# Altium PCB main.PcbDoc
Units mm, origin at the board's own origin, x right, y up, seen from the top; angles counter-clockwise.
Board outline 161.93 x 70.61 mm, 2 copper layers (Top Layer, Bottom Layer); 28 components, 53 nets, 163 pads, 28 vias.
Unrouted connection lines stored in the file: 2.
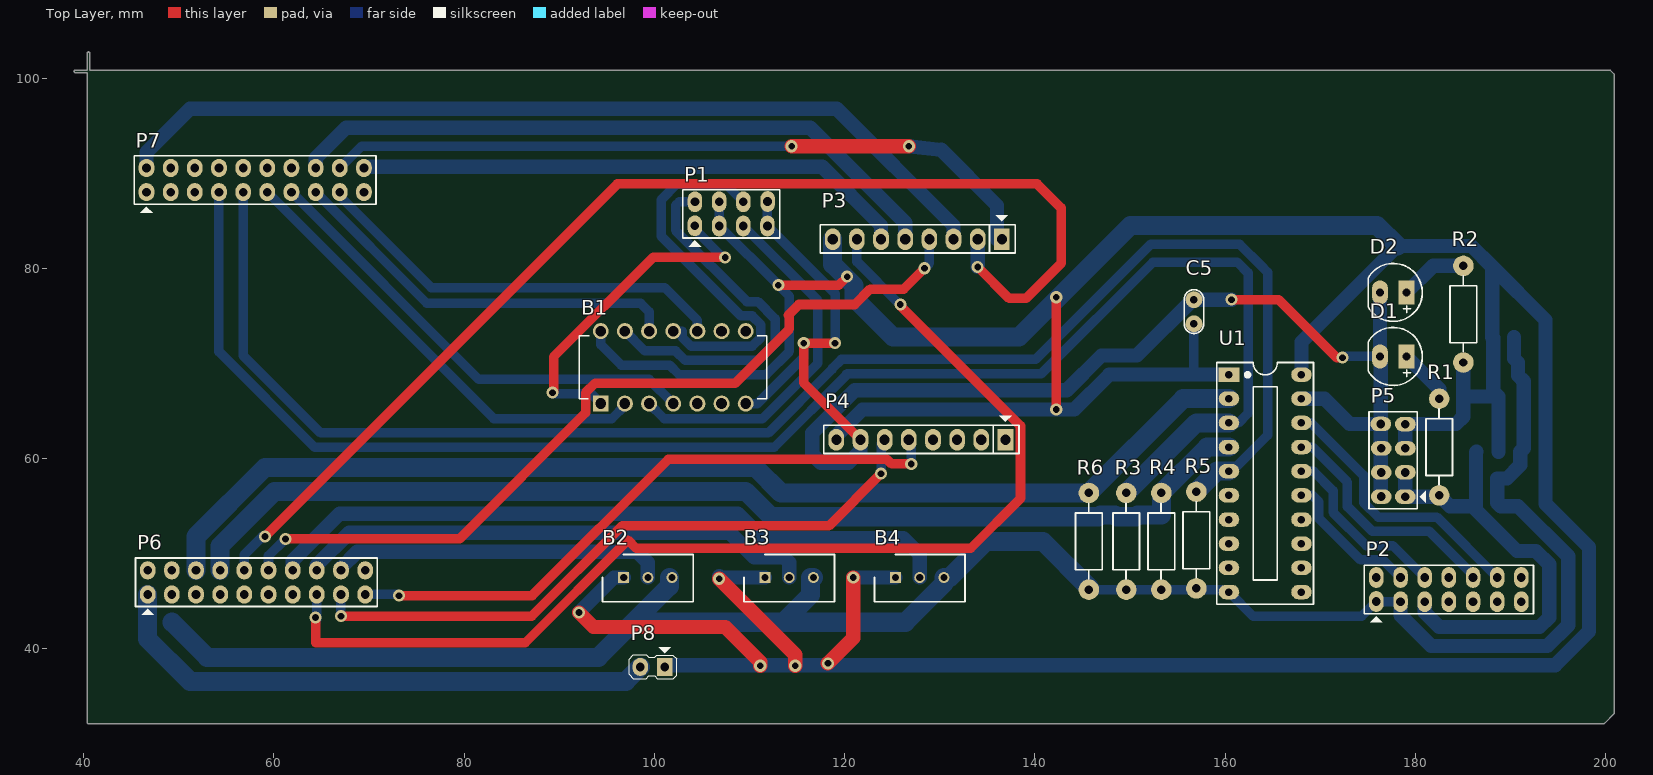
[diagram p0: Top Layer view]
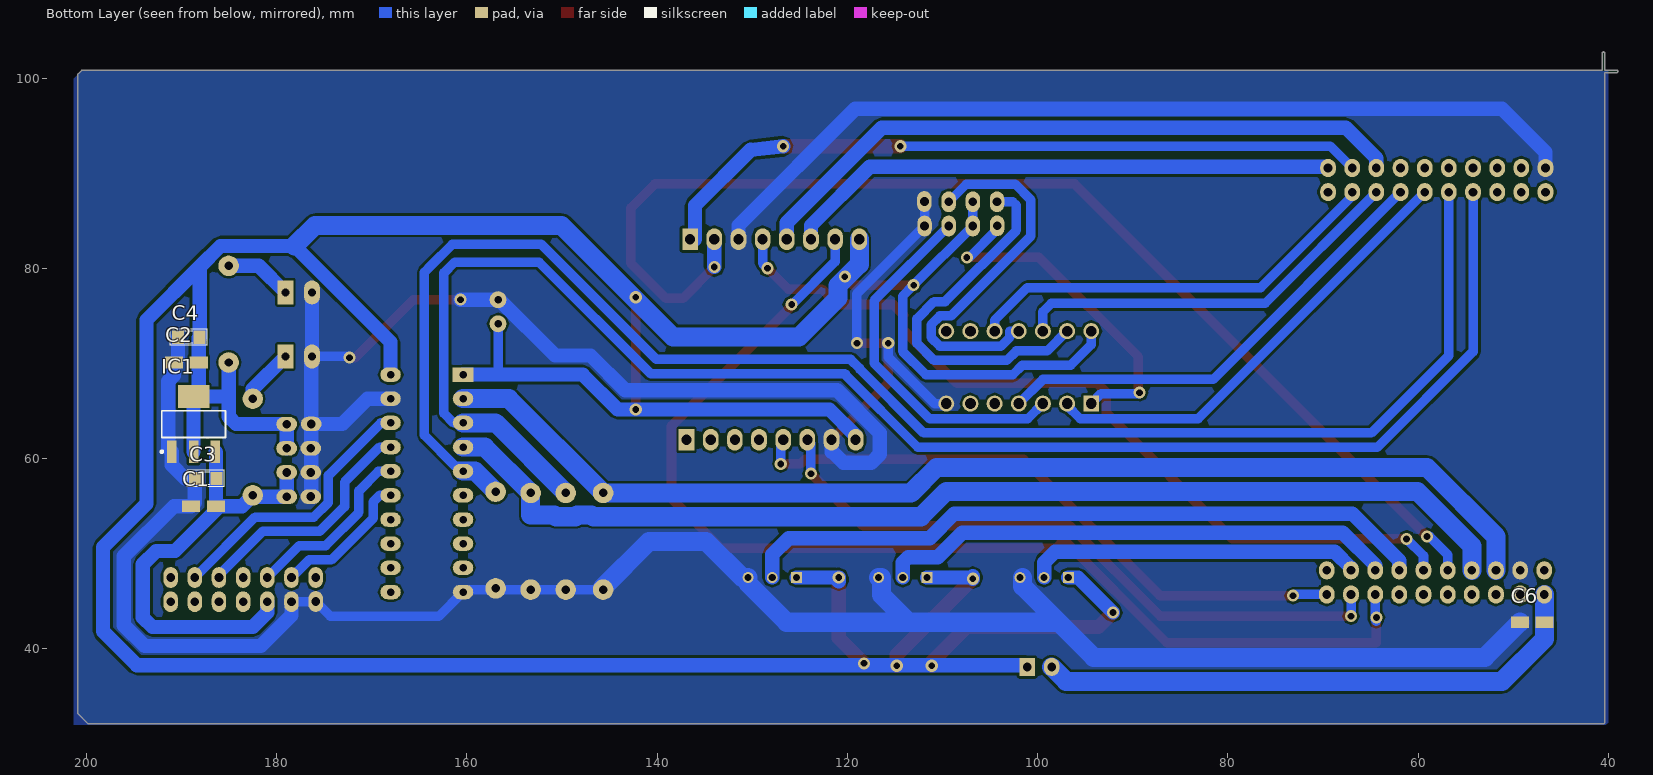
[diagram p1: Bottom Layer view, seen from below]
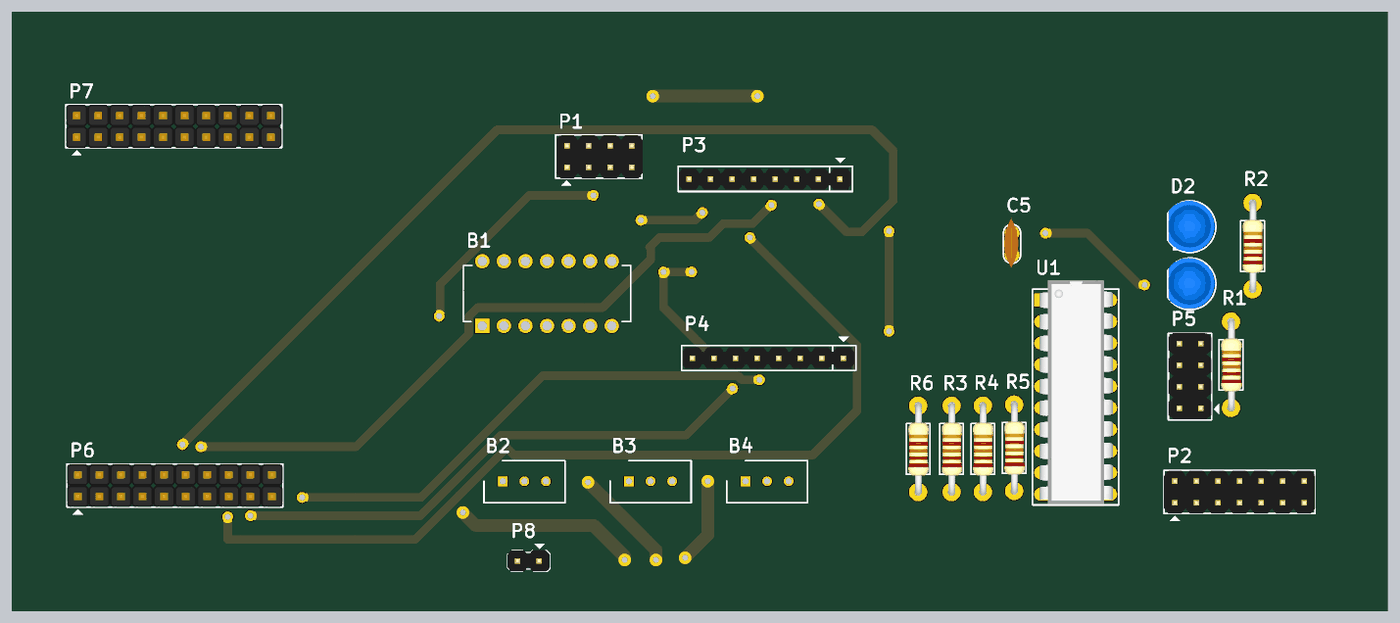
[diagram p2: 3D render of the assembled board from above, using the file's embedded part models]
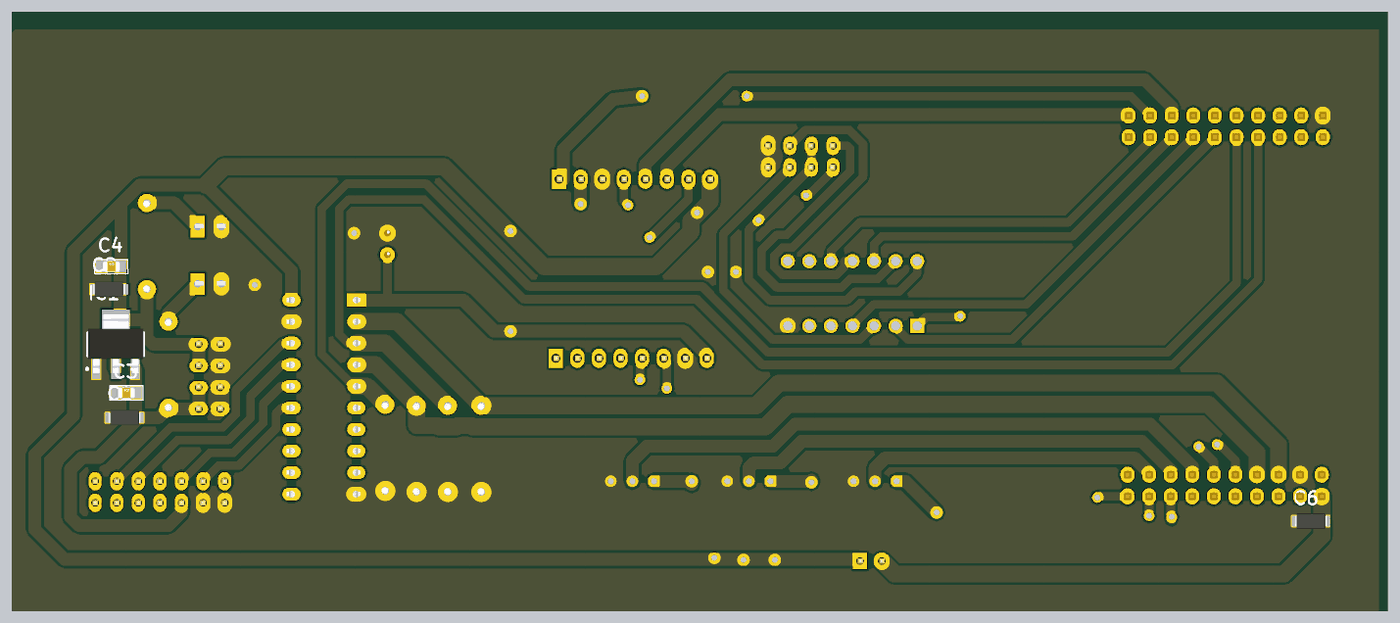
[diagram p3: 3D render of the assembled board from below, using the file's embedded part models]

## Layer stack, top to bottom
Top Solder: solder mask 0.0102, Solder Resist, Dk 3.5
Top Layer: signal copper 0.0356
Dielectric 1: dielectric 0.32, FR-4, Dk 4.8
Bottom Layer: signal copper 0.0356
Bottom Solder: solder mask 0.0102, Solder Resist, Dk 3.5

## Board outline
39.116,100.584 40.386,100.584 40.386,32.258 ccw(c40.513,32.258) 40.513,32.131 199.771,32.131 ccw(c199.771,32.258) 199.862,32.168 199.861,32.168 200.877,33.184 200.877,33.183 ccw(c200.787,33.274) 200.914,33.274 200.914,100.33 ccw(c200.787,100.33) 200.877,100.421 200.877,100.42 200.496,100.801 200.497,100.801 ccw(c200.406,100.711) 200.406,100.838 40.64,100.838 40.64,102.616 ccw(c40.513,102.616) 40.386,102.616 40.386,100.838 39.116,100.838 ccw(c39.116,100.711)

## Design rules (kind name [scope] priority, off if disabled: settings)
Clearance [All] p1: gap=0.254 ignorepadtopadclearanceinfootprint=FALSE except(0: Arc-Hole Track-Hole SMDPad-Hole THPad-Hole Via-Hole Fill-Hole Poly-Hole Region-Hole Text-Hole; 0.5: Arc-Arc Arc-Track Track-Track)
PlaneConnect [All] p1: planeconnectstyle=Direct reliefexpansion=0.508 reliefentries=4 reliefconductorwidth=0.254 reliefairgap=0.254
PolygonConnect [All] p1: connectstyle=Direct reliefconductorwidth=0.254 reliefentries=4 polygonreliefangle="90 Angle" airgapwidth=0.254
RoutingVias [All] p1: holewidth=0.711 width=1.27 viastyle="Through Hole" minholewidth=0.711 minwidth=1.27 maxholewidth=0.711 maxwidth=1.27
SolderMaskExpansion [All] p1: expansion=0.102
Width [All] p1: maxlimit=2 minlimit=1 preferedwidth=1.5
29 further rules are at their usual default settings.

## Components (designator, comment, footprint, x,y, rotation, side; value= is the part's Value field where it differs from the comment)
B1 "SN74HC14N" DIP254P762X508-14 109.601,73.406 r90 top
B2 "3296W-1-103LF" SHDR3W54P0X254_1X3_953X483X1155P 96.774,47.498 r180 top
B3 "3296W-1-103LF" SHDR3W54P0X254_1X3_953X483X1155P 111.633,47.498 r180 top
B4 "3296W-1-103LF" SHDR3W54P0X254_1X3_953X483X1155P 125.349,47.498 r180 top
C1 "Capacitors" "CAP TANTALUM SMD-1206" 187.676,54.991 r0 bottom
C2 "Capacitors" "CAP TANTALUM SMD-1206" 189.484,70.104 r0 bottom
C3 "Cap Non-Pol SMD" CAP-SM-0805 188.595,57.912 r180 bottom value=100nF
C4 "Cap Non-Pol SMD" CAP-SM-0805 190.373,72.771 r180 bottom value=100nF
C5 "Cap Non-Pol" CN1 156.718,74.168 r90 top value=100nF
C6 "Capacitors" "CAP TANTALUM SMD-1206" 48.006,42.799 r0 bottom
D1 "LED" LED-5mm 177.673,70.739 r180 top
D2 "LED" LED-5mm 177.673,77.47 r180 top
IC1 "LM1117" SOT223-4N 188.722,63.627 r90 bottom value=LM317
P1 "Header 4X2" JP4x2 104.267,84.455 r0 top
P2 "Header 7X2" JP7X2 175.895,44.958 r0 top
P3 "CC2500" JP8 136.525,83.058 r180 top
P4 "MPU6050" JP8 136.906,61.976 r180 top
P5 "Header 4X2" JP4x2 178.943,56.007 r90 top
P6 "Header 10X2" JP10X2 46.736,45.72 r0 top
P7 "Header 10X2" JP10X2 46.609,88.011 r0 top
P8 "Header 2" JP2 101.092,38.1 r180 top
R1 "Resistor 1/4W" "RES 1/2W" 182.499,66.294 r270 top value=2K2
R2 "Resistor 1/4W" "RES 1/2W" 185.039,80.264 r270 top value=330
R3 "Resistor 1/4W" "RES 1/2W" 149.606,56.388 r270 top
R4 "Resistor 1/4W" "RES 1/2W" 153.289,56.388 r270 top
R5 "Resistor 1/4W" "RES 1/2W" 156.972,56.515 r270 top
R6 "Resistor 1/4W" "RES 1/2W" 145.669,56.388 r270 top value=10K
U1 "74HC245" DIP20/W0.3 160.401,68.834 r270 top

## Footprints (in the part's own frame and the unit in brackets; to place one, negate y for a bottom-side part, rotate by r counter-clockwise, add the part's x,y. Pads: shape width x height; smd on the part's side, far side on the other; paste and mask are expansions set on the pad)
"CAP TANTALUM SMD-1206" [mm] "Molded Capacitor, 2-Leads, Body 3.30x1.70mm, IPC Medium Density"
  rect 1.9x1.25 smd: 1(-1.3,0) 2(1.3,0)
  body extent -1.92,-0.9 1.92,0.9, height 1.6
CAP-SM-0805 [mil]
  rect 50x55 smd: 1(0,0) 2(90,0)
  silkscreen extent -32,-34 121,33, body extent 6,-25 84,25, height 31
CN1 [mil]
  round 70 hole 31: 1(0,0) 2(100,0)
  silkscreen extent -40,-40 141,40, body extent -60,-30 170,37, height 265
DIP20/W0.3 [mil] "DIP 20, 20 PIN, W 300mil, Pin to pin 100mil"
  rect 60x85 hole 31: 1(0,0)
  oval 60x85 hole 31: 2(100,0) 3(200,0) 4(300,0) 5(400,0) 6(500,0) 7(600,0) 8(700,0) 9(800,0) 10(900,0) 11(900,300) 12(800,300) 13(700,300) 14(600,300) 15(500,300) 16(400,300) 17(300,300) 18(200,300) 19(100,300) 20(0,300)
  silkscreen extent -50,-50 950,350, body extent -91,-18 945,322, height 155
DIP254P762X508-14 [mil]
  rect 66x66 / inner round 66 / far side rect 66x66 hole 44: 1(-300,600)
  round 66 hole 44: 2(-300,500) 3(-300,400) 4(-300,300) 5(-300,200) 6(-300,100) 7(-300,0) 8(0,0) 9(0,100) 10(0,200) 11(0,300) 12(0,400) 13(0,500) 14(0,600)
  silkscreen extent -280,-88 -20,688
JP2 [mil]
  rect 65x75 hole 36: 1(0,0)
  oval 65x75 hole 36: 2(101,0)
  silkscreen extent -49,-81 148,48, body extent -48,-50 148,48, height 323
JP4x2 [mil] "Connector 4x2"
  oval 60x86 hole 36: 1(-0.5,0.5) 2(0,100) 3(100,0) 4(100,100) 5(200,0) 6(200,100) 7(300,0) 8(300.5,101.5)
  silkscreen extent -50,-85 350,150, body extent -47,-50 353,150, height 335
JP7X2 [mil]
  oval 60x86 hole 36: 1(-0.5,0.5) 2(0,100) 3(100,0) 4(100,100) 5(200,0) 6(200,100) 7(300,0) 8(300,100) 9(400,0) 10(400,100) 11(500,0) 12(500,100) 13(600,0) 14(600,100)
  silkscreen extent -50,-85 650,150, body extent -50,-50 650,150, height 335
JP8 [mil] "JP8"
  rect 65x90 hole 42: 1(0,0)
  oval 65x90 hole 42: 2(100,0) 3(200,0) 4(300,0) 5(400,0) 6(500,0) 7(600,0) 8(700,0)
  silkscreen extent -56,-100 752,57, body extent -48,-50 748,48, height 323
JP10X2 [mil]
  oval 65x75 hole 36: 1(0,0) 2(0,100) 3(100,0) 4(100,100) 5(200,0) 6(200,100) 7(300,0) 8(300,100) 9(400,0) 10(400,100) 11(500,0) 12(500,100) 13(600,0) 14(600,100) 15(700,0) 16(700,100) 17(800,0) 18(800,100) 19(900,0) 20(900,100)
  silkscreen extent -50,-85 950,150, body extent -50,-50 950,150, height 314
LED-5mm [mil] "LED 2 PIN, 5 ly , Only colour, pin to pin 110mil"
  rect 65x100 hole 32: 1(-55,0)
  oval 65x100 hole 32: 2(55,0)
  silkscreen extent -120,-120 104,120, body extent -113,-120 100,117, height 339
"RES 1/2W" [mil] "R 1/2W, 2 pin, 300mil"
  round 85 hole 35: 1(0,0) 2(400,0)
  silkscreen extent 42,-55 356,55, body extent -12,-45 414,49, height 91
SHDR3W54P0X254_1X3_953X483X1155P [mm]
  rect 1.15x1.15 / inner round 1.15 / far side rect 1.15x1.15 hole 0.75: 1(0,0)
  round 1.15 hole 0.75: 2(-2.54,0) 3(-5.08,0)
  silkscreen extent -7.31,-2.41 2.22,2.55
SOT223-4N [mm] "SOT223, 4-Leads, Body 6.5x3.5mm, Pitch 2.3mm, Lead Span 7mm, IPC Medium Density"
  rect 2.4x1 smd: 1(-2.9,2.3) 2(-2.9,0) 3(-2.9,-2.3)
  rect 2.4x3.3 smd: 4(2.9,0)
  silkscreen extent -3.02,-3.35 1.4,3.48, body extent -3.39,-3.27 3.5,3.23, height 1.72

## Part data
B1: "Hex invertor,SN74HC14N DIP14 2-6V 25pcs", Manufacturer_Name="Texas Instruments", RS Part Number=0442943, Datasheet Link=http://componentsearchengine.com/Datasheets/3/SN74HC14N.pdf, Geometry.Height=mm, Manufacturer_Part_Number=SN74HC14N, Supplier_Name=RS
B2 B3 B4: "Bourns 3296W Series 25-Turn Through Hole Cermet Trimmer Resistor with Pin Terminations, 10000???? ????10% 1/2W ????100ppm/????C", Manufacturer_Name=Bourns, RS Part Number=5219647P, Allied_Number=70153918, Datasheet Link=http://docs-europe.electrocomponents.com/webdocs/069c/0900766b8069ccf4.pdf, Geometry.Height=11.55mm, Manufacturer_Part_Number=3296W-1-103LF, Supplier_Name=RS
C1 C2 C6: library part "Cap Pol Tantalum", "Capacitors Tantalum", Capacitance=10uF, ESR (Equivalent Series Resistance)="3.8 Ohm", Lifetime @ Temp.="2000 Hrs @ 85°C", Manufacturer=Kemet, Manufacturer Part Number=T491A106K010AT, Manufacturer Size Code=A, Operating Temperature="-55°C ~ 125°C", Package / Case="1206 (3216 Metric)", Tolerance=±10%, Voltage - Rated=10V, Category=Capacitors, ComponentLink1Description=http://www.kemet.com/Lists/ProductCatalog/Attachments/254/KEM_T2005_T491.pdf, ComponentLink1URL=http://www.kemet.com/Lists/ProductCatalog/Attachments/254/KEM_T2005_T491.pdf, Features="General Purpose", Height - Seated (Max)="0.071\" (1.80mm)", Lead Spacing=-, Mounting Type="Surface Mount", Packaging="Tape & Reel (TR)", Part Status=Active, Pricing 1="2000=0.0626, 4000=0.05791, 10000=0.05478, 14000=0.05196, 50000=0.04695, 100000=0.04147 (USD)", RoHS="RoHS Compliant", Size / Dimension="0.126\" L x 0.063\" W (3.20mm x 1.60mm)", Stock 1=316000, Supplier 1=Digi-Key, Type=Molded
C3 C4 C5: "Capacitor"
IC1: "Available in 1.8V, 2.5V, 2.85V, 3.3V, 5V, and  Adjustable Versions"
P1 P5: "Header, 4-Pin, Dual row", LatestRevisionDate=17-Jul-2002, LatestRevisionNote="Re-released for DXP Platform.", Publisher="Altium Limited"
P2: "Header, 7-Pin, Dual row", LatestRevisionDate=17-Jul-2002, LatestRevisionNote="Re-released for DXP Platform.", Publisher="Altium Limited"
P3 P4: library part "Header 8", "Header, 8-Pin", LatestRevisionDate=17-Jul-2002, LatestRevisionNote="Re-released for DXP Platform.", Publisher="Altium Limited"
P6 P7: "Header, 10-Pin, Dual row", LatestRevisionDate=17-Jul-2002, LatestRevisionNote="Re-released for DXP Platform.", Publisher="Altium Limited"
P8: "Header, 2-Pin", LatestRevisionDate=17-Jul-2002, LatestRevisionNote="Re-released for DXP Platform.", Publisher="Altium Limited"
R1 R2 R3 R4 R5 R6: library part RES
U1: "Octal bus tranceiver"

## Via types
v1: diameter 1.27, hole 0.711, Top Layer to Bottom Layer, 28 vias

## Nets (pads, with @x,y where several pads share a name; then routed paths per layer and width w, separated by ;. In a path a pad name is that pad's centre, name@x,y a point inside that pad or via, vN(x,y) a via of type N, cw(c..) or ccw(c..) an arc to the next point about the centre after c; other vN are vias at no path point)
3V3: B1.14 B2.1 B3.1 B4.1 C2.1 C4.2 C5.1 IC1.2 IC1.4 P1.3 P1.4 P3.8 P4.8 P5.5 P5.7 P8.1 R2.2 U1.1 U1.20 | length 451.3
  Top Layer w1: v1(113.03,78.232) 119.38,78.232 v1(120.269,79.121) ; v1(142.24,65.151) v1(142.24,76.962)
  Top Layer w1.5: v1(92.075,43.815) 93.599,42.291 107.442,42.291 111.125,38.608 v1(111.125,38.227) ; v1(106.807,47.371) 114.808,39.37 v1(114.808,38.227) ; v1(118.237,38.481) 120.904,41.148 v1(120.904,47.498)
  Bottom Layer w1: B1.14 94.361,71.985 96.52,69.826 101.607,69.826 102.619,68.814 111.74,68.814 114.193,71.267 114.193,77.069 v1(113.03,78.232) P1.3 P1.4 ; 156.718,68.834 C5.1
  Bottom Layer w1.5: v1(92.075,43.815) 95.758,47.498 B2.1 ; P8.1 101.283,38.291 118.237,38.291 194.697,38.291 198.247,41.841 198.247,50.673 193.675,55.245 193.675,74.575 188.087,80.163 ; v1(106.807,47.371) 106.807,47.625 106.934,47.498 B3.1 ; P4.8 119.126,62.411 121.866,65.151 v1(142.24,65.151) 144.145,65.151 147.828,68.834 156.718,68.834 U1.1 ; v1(120.904,47.498) 120.904,47.117 121.285,47.498 B4.1 ; U1.20 168.021,72.247 178.122,82.348 185.902,82.348 188.087,80.163 ; P5.5 P5.7 184.277,63.627 185.039,64.389 R2.2 ; 185.314,66.527 IC1.4 ; IC1.2 IC1.4 ; 188.087,80.163 C4.2 188.184,72.674 C2.1 188.184,67.065 IC1.4
  Bottom Layer w2: P3.8 118.745,80.425 120.999,78.171 120.999,76.867 125.095,72.771 138.303,72.771 150.058,84.526 175.943,84.526 178.122,82.348
3V3_Tiva_Pow: C6.1 P6.1 P8.2 | length 59
  Bottom Layer w2: P6.1 46.736,42.829 C6.1 46.706,41.051 51.181,36.576 97.003,36.576 P8.2
5V: C1.1 C3.2 IC1.3 P2.5 P5.1 P5.3 R1.2 | length 47.6
  Bottom Layer w1.5: P5.3 178.943,56.007 P5.1 182.359,55.994 R1.2 183.642,54.991 C1.1 ; P2.5 180.975,43.815 182.499,42.291 193.04,42.291 194.056,43.307 194.056,48.895 192.659,50.292 190.68,50.292 186.376,54.596 C1.1 ; IC1.3 186.376,60.681 C1.1
A0_PE3: B2.2 P6.18 | length 35.3
  Bottom Layer w1.5: P6.18 67.056,48.514 68.759,50.217 98.175,50.217 99.314,49.077 B2.2
A1_PE2: B3.2 P6.16 | length 54.5
  Bottom Layer w1.5: P6.16 64.516,48.802 67.93,52.216 107.93,52.216 110.509,49.638 113.612,49.638 114.173,49.077 B3.2
A2_PE1: B4.2 P6.14 | length 73.2
  Bottom Layer w1.5: P6.14 61.976,49.276 66.916,54.216 108.758,54.216 111.337,51.638 126.162,51.638 127.889,49.911 B4.2
CS_PA3: P3.1 P7.18 | length 76.5
  Top Layer w1.5: v1(114.427,92.837) v1(126.746,92.837)
  Bottom Layer w1: P7.18 69.215,92.837 v1(114.427,92.837)
  Bottom Layer w1.5: v1(126.746,92.837) 130.156,92.456 136.017,86.595 136.017,83.058 P3.1
Encoder0A: B1.1 P1.1 | length 36.5
  Top Layer w1: v1(89.281,66.929) 89.408,67.056 89.408,70.705 99.856,81.153 v1(107.442,81.153)
  Bottom Layer w1: v1@89.281,66.826 93.321,66.826 B1.1 ; P1.1 104.254,84.087 107.188,81.153 v1(107.442,81.153)
Encoder0A_PC6: B1.2 P7.11 | length 48.2
  Bottom Layer w1: P7.11 83.126,64.194 95.512,64.194 96.901,65.583 B1.2
Encoder0B: B1.3 P1.5 | length 38.5
  Bottom Layer w1: B1.3 101.033,64.194 111.362,64.194 117.193,70.025 117.193,71.511 117.197,71.515 117.197,76.605 P1.5
Encoder0B_PC7: B1.4 P7.13 | length 49.3
  Bottom Layer w1: P7.13 81.534,68.326 99.441,68.326 B1.4
Encoder1A: B1.13 P1.2 | length 39.5
  Bottom Layer w1: B1.13 98.981,71.326 102.228,71.326 103.24,70.314 110.882,70.314 112.693,72.125 112.693,74.687 110.882,76.498 109.721,76.498 102.235,83.985 102.235,86.614 102.616,86.995 P1.2
Encoder1A_PD6: B1.12 P7.15 | length 42.3
  Bottom Layer w1: P7.15 76.073,76.327 98.552,76.327 99.441,75.438 B1.12
Encoder1B: B1.11 P1.6 | length 40.2
  Bottom Layer w1: B1.11 102.929,73.406 102.929,72.746 103.861,71.814 110.261,71.814 111.193,72.746 111.193,74.066 110.261,74.998 109.1,74.998 100.735,83.363 100.735,87.235 102.341,88.841 107.501,88.841 P1.6
Encoder1B_PD7: B1.10 P7.17 | length 44.6
  Bottom Layer w1: P7.17 66.929,87.592 76.543,77.978 101.092,77.978 104.521,74.549 B1.10
FAULT: P2.14
GDO0_PD2: P3.2 P6.10 | length 125.3
  Top Layer w1: v1(59.055,51.816) 96.118,88.879 140.229,88.879 142.748,86.36 142.748,80.518 139.065,76.835 137.287,76.835 v1(133.985,80.137)
  Bottom Layer w1: P6.10 56.896,49.911 58.801,51.816 v1(59.055,51.816) ; v1(133.985,80.137) v1@134.112,80.01
  Bottom Layer w1.5: v1(133.985,80.137) P3.2
GDO2_PD3: P3.4 P6.12 | length 88.6
  Top Layer w1: v1(61.214,51.562) 79.516,51.562 92.769,64.815 92.769,66.937 93.777,67.945 108.513,67.945 114.197,73.629 114.197,75.057 114.056,75.057 115.199,76.2 121.055,76.2 122.681,77.826 126.213,77.826 v1(128.397,80.01)
  Bottom Layer w1: P6.12 59.436,49.784 v1(61.214,51.562) ; v1(128.397,80.01) 128.905,80.518 P3.4
GND: B1.7 B2.3 B3.3 B4.3 C1.2 C2.2 C3.1 C4.1 C5.2 C6.2 D1.2 D2.2 IC1.1 P1.7 P1.8 P2.1 P2.3 P3.3 P4.7 P5.2 P5.4 P5.6 P5.8 P6.4 P7.2 R3.2 R4.2 R5.2 R6.2 U1.10 U1.19 | length 457.1
  Top Layer w1: v1(118.999,72.136) v1(115.697,72.136) 115.697,67.956 121.666,61.987 P4.7 ; v1(160.655,76.708) 165.608,76.708 171.704,70.612 v1(172.339,70.612)
  Bottom Layer w1: B1.7 110.833,65.786 115.693,70.646 115.693,72.136 v1(115.697,72.136) ; P1.8 111.887,87.02 P1.7 118.999,77.343 v1(118.999,72.136) ; R6.2@146.05,46.355 146.177,46.228 R3.2 R4.2 160.147,46.228 U1.10 162.941,43.434 174.346,43.434 P2.1 178.422,44.971 P2.3 ; v1(172.339,70.612) 172.466,70.739 D1.2
  Bottom Layer w1.5: P7.2 46.609,92.202 51.181,96.774 119.166,96.774 131.445,84.495 P3.3 ; P4.7 121.666,60.706 121.539,60.706 120.396,59.563 117.475,59.563 116.586,60.452 116.586,62.7 121.069,67.183 143.349,67.183 147,70.834 150.707,70.834 156.581,76.708 C5.2 v1(160.655,76.708) ; U1.19@167.767,66.294 U1.19 170.434,66.294 173.088,63.64 P5.8 ; D2.2 D1.2 176.365,70.65 P5.8 ; P5.2 176.365,56.045 P5.8 ; P2.3 178.435,43.527 181.671,40.291 193.868,40.291 196.056,42.479 196.056,49.723 190.788,54.991 C1.2 188.595,55.372 C3.1 189.615,57.912 191.022,59.319 IC1.1 191.376,61.081 191.376,68.143 190.788,68.731 190.784,68.731 C2.2 190.373,70.515 C4.1
  Bottom Layer w2: C6.2 52.989,39.116 94.114,39.116 97.797,42.799 ; B2.3@101.564,47.486 101.564,46.566 97.797,42.799 ; B3.3 116.423,47.498 116.423,45.684 113.538,42.799 ; R6.2@145.787,46.346 140.824,51.308 134.874,51.308 131.064,47.498 B4.3 130.429,46.856 126.372,42.799 113.538,42.799 ; 97.797,42.799 113.538,42.799
M1: P2.7
M2: P2.9
M3: P2.11
MISO_PA4: P3.5 P7.16 | length 70.2
  Bottom Layer w1.5: P7.16 64.389,91.567 67.596,94.774 116.374,94.774 126.365,84.783 P3.5
MOSI_PA5: P3.7 P6.15 | length 121.4
  Top Layer w1: v1(64.389,43.307) 64.389,40.64 86.425,40.64 97.22,51.435 98.078,50.577 133.254,50.577 138.486,55.809 138.486,63.431 125.857,76.06 v1(125.857,76.2)
  Bottom Layer w1: v1(64.389,43.307) 64.389,42.926 64.516,43.053 P6.15 ; P3.7 121.285,80.714 125.799,76.2 v1(125.857,76.2)
NetD1_1: D1.1 R1.1 | length 5.9
  Bottom Layer w1.5: D1.1 182.499,67.31 R1.1
NetD2_1: D2.1 R2.1 | length 7.1
  Bottom Layer w1.5: D2.1 181.864,80.264 R2.1
OTW: P2.13
PB1: P6.7
PB3: P7.5
PB5: P6.3
PB6: P7.14
PB7: P7.12
PE0: P7.6
PE4: P6.9
PE5: P6.11
PF0: P7.8
PF1: P6.20
PF2: P7.1
PF3: P7.3
PF4: P7.19
PWMA: P2.12 U1.18 | length 29
  Bottom Layer w1: U1.18 169.037,63.754 174.557,58.234 174.557,55.378 176.091,53.844 182.249,53.844 P2.12
PWMA_PD0: P6.6 R6.1 U1.2 | length 120.3
  Bottom Layer w2: P6.6 51.816,51.816 59.055,59.055 110.637,59.055 113.304,56.388 R6.1 155.575,66.294 U1.2
PWMB: P2.2 P2.8
PWMC: P2.6 U1.16 | length 18.9
  Bottom Layer w1: U1.16 169.291,58.674 171.355,56.61 171.355,54.338 174.848,50.844 177.629,50.844 P2.6
PWMC_PD1: P6.8 R4.1 U1.4 | length 116.6
  Bottom Layer w2: P6.8 54.356,50.82 60.091,56.555 109.602,56.555 112.269,53.888 146.705,53.888 146.871,54.054 148.404,54.054 148.57,53.888 150.642,53.888 150.808,54.054 153.289,54.054 R4.1 158.115,61.214 U1.4
RST: P7.10
RSTAB: P2.10 U1.17 | length 25.4
  Bottom Layer w1: U1.17 169.164,61.214 172.855,57.523 172.855,54.959 175.47,52.344 181.463,52.344 186.055,47.752 P2.10
RSTAB_PC4: P7.7 R3.1 U1.3 | length 168.7
  Bottom Layer w1: P7.7 54.229,71.247 64.282,61.194 112.605,61.194 120.193,68.782 120.193,68.854 120.272,68.933 140.688,68.933 152.4,80.645 161.29,80.645 162.405,79.53 162.405,64.762 161.397,63.754 U1.3
  Bottom Layer w2: R3.1 156.972,63.754 U1.3
RSTCD: P2.4 U1.15 | length 15
  Bottom Layer w1: U1.15 169.164,56.134 169.855,55.443 169.855,53.717 174.227,49.344 176.589,49.344 P2.4
RSTCD_PC5: P7.9 R5.1 U1.5 | length 165.1
  Bottom Layer w1: P7.9 56.769,70.828 64.904,62.694 111.984,62.694 118.693,69.403 118.693,69.476 119.65,70.433 140.067,70.433 152.16,82.526 161.53,82.526 163.748,80.309 164.465,79.591 164.465,62.45 161.229,59.214 160.401,59.214 U1.5
  Bottom Layer w2: R5.1 159.131,58.674 U1.5
SCL_PA6: P4.6 P6.17 | length 69
  Top Layer w1: v1(67.056,43.434) 87.098,43.434 96.599,52.935 118.34,52.935 v1(123.825,58.42)
  Bottom Layer w1: v1(67.056,43.434) P6.17 ; v1(123.825,58.42) 123.825,61.595 P4.6
SCLK_PA2: P3.6 P7.20 | length 58.4
  Bottom Layer w1.5: P7.20 69.596,90.678 117.642,90.678 123.825,84.495 P3.6
SDA_PA7: P4.5 P6.19 | length 66.2
  Top Layer w1: v1(73.152,45.593) 87.135,45.593 101.462,59.92 124.446,59.92 124.93,59.436 v1(127,59.436)
  Bottom Layer w1: P6.19 73.025,45.72 v1(73.152,45.593) ; P4.5 127,61.722 v1(127,59.436)
pads on no net: B1.5 B1.6 B1.8 B1.9 P4.1 P4.2 P4.3 P4.4 P6.2 P6.5 P6.13 P7.4 U1.6 U1.7 U1.8 U1.9 U1.11 U1.12 U1.13 U1.14

## Polygon pours and split planes (outlines as drawn)
GND on Bottom Layer "AutoNaming" (solid, pour order 2): 40.005,100.711 40.005,32.258 40.259,32.004 201.295,32.004 201.295,99.949 200.533,100.711